# EAGLE board MicroMod_Processor_Board-nRF52840-Panel (EAGLE 9.4.2), part 1 of 6
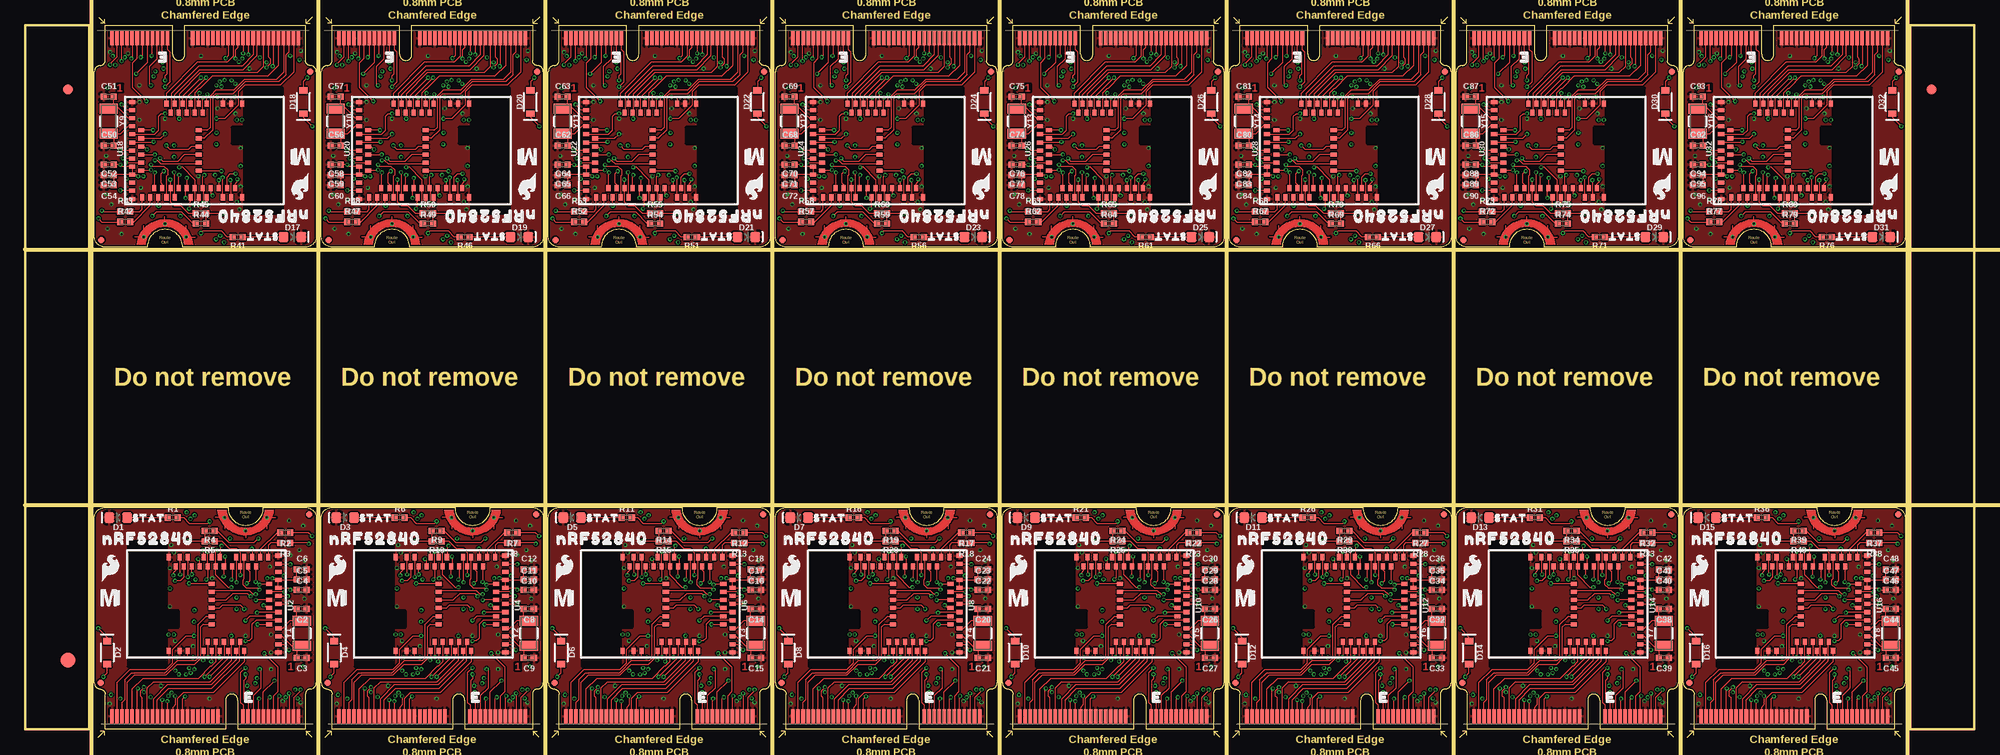
[diagram p0: board, top side]
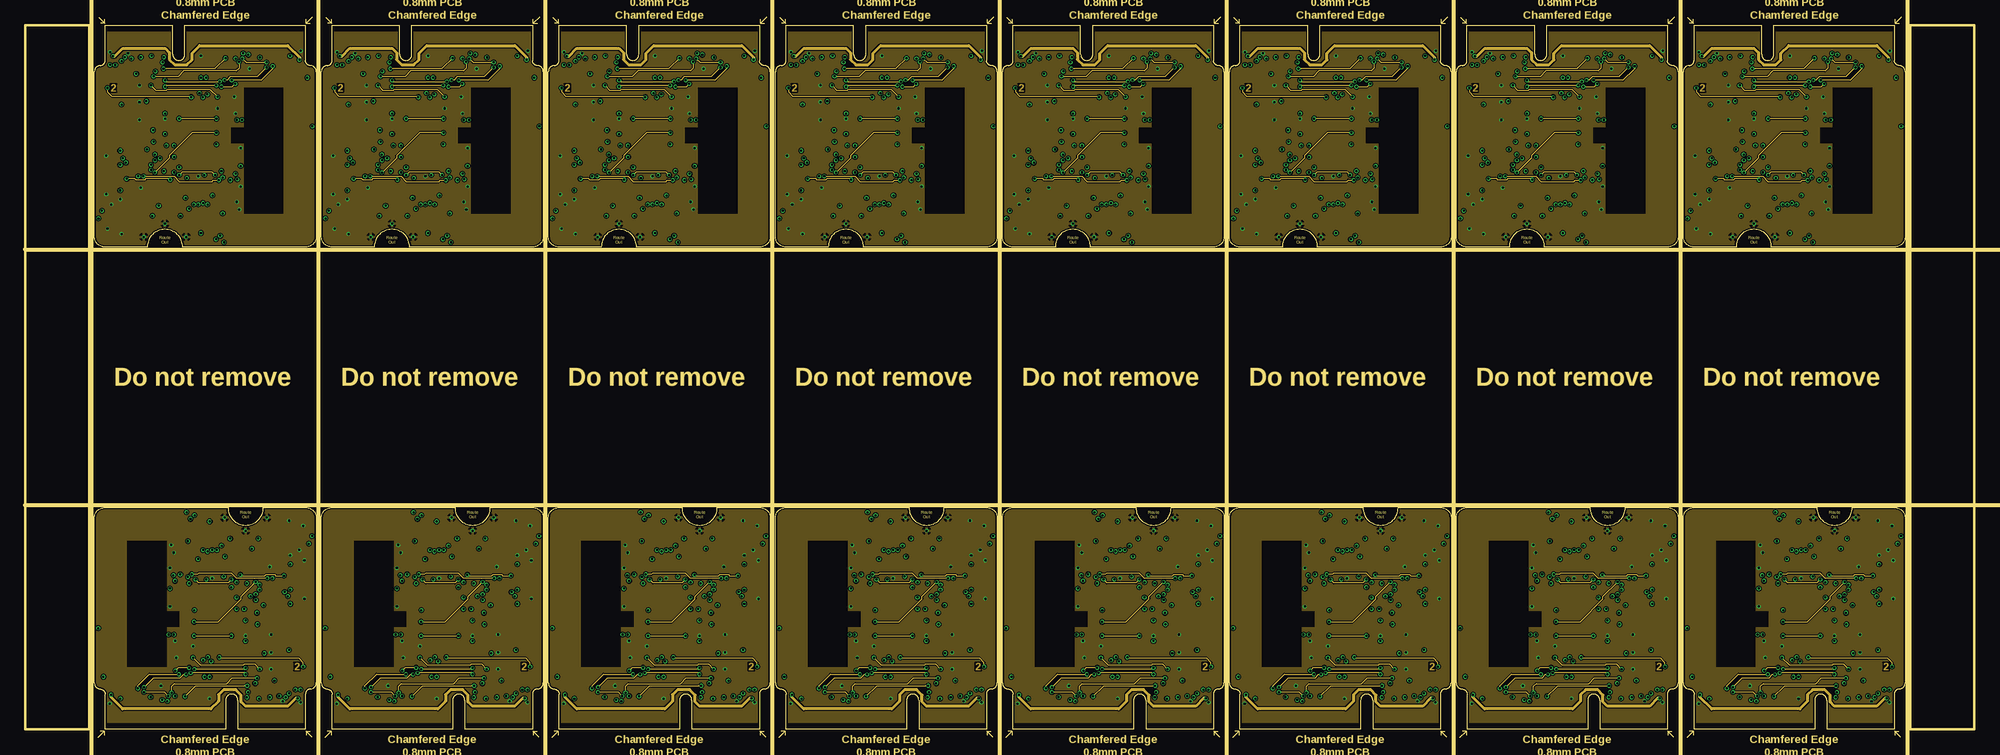
[diagram p1: board, inner layer Route2]
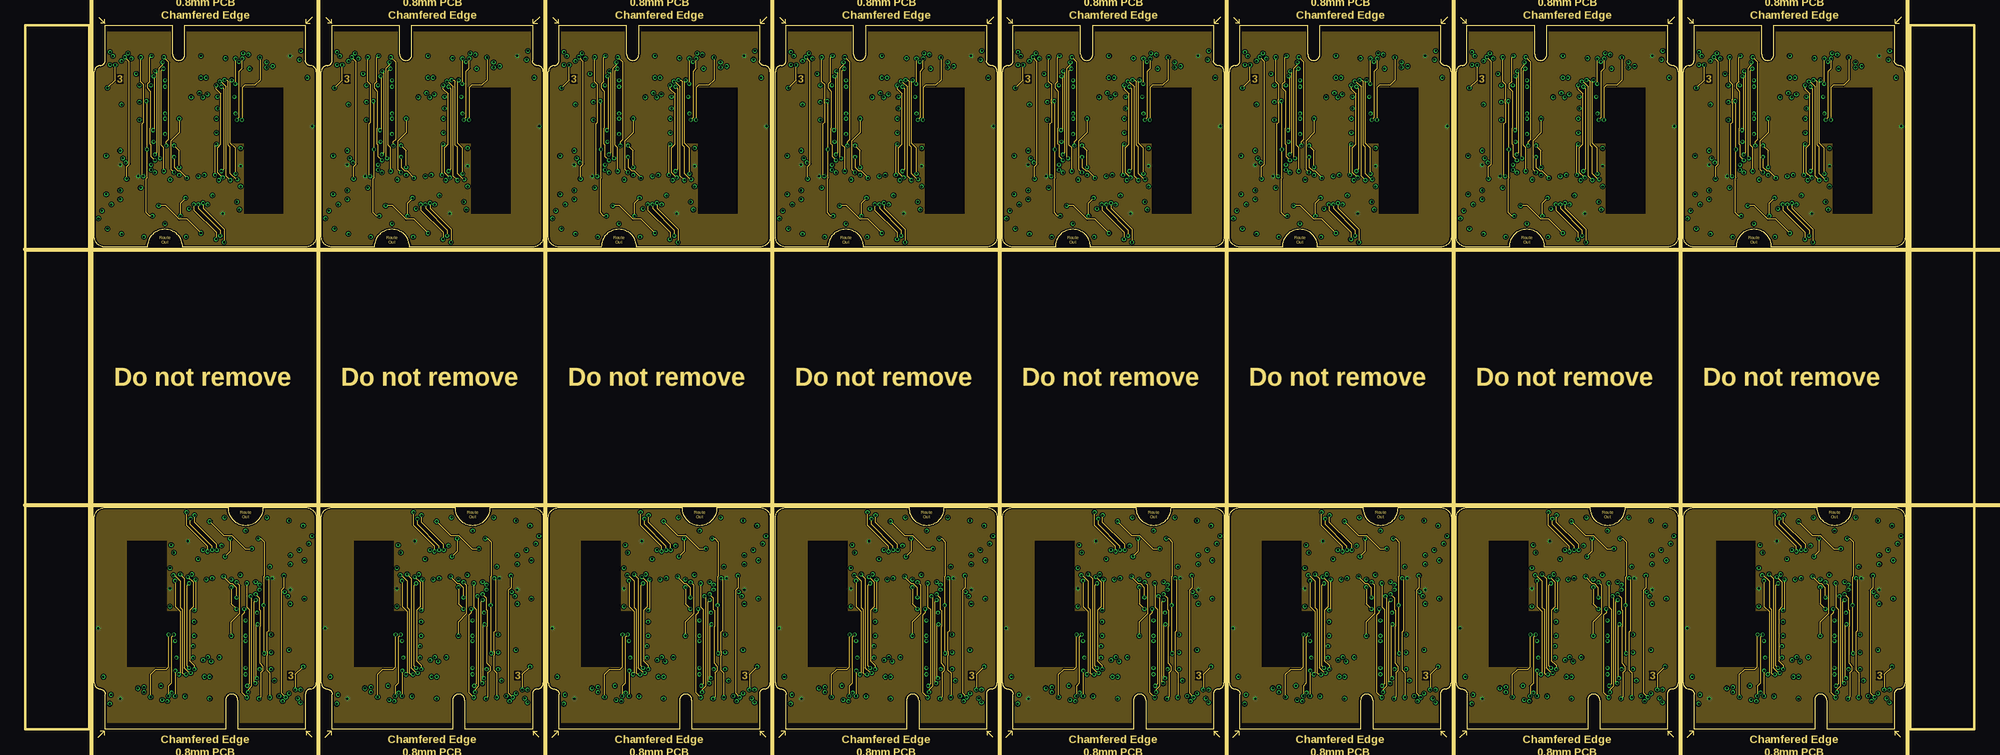
[diagram p2: board, inner layer Route15]
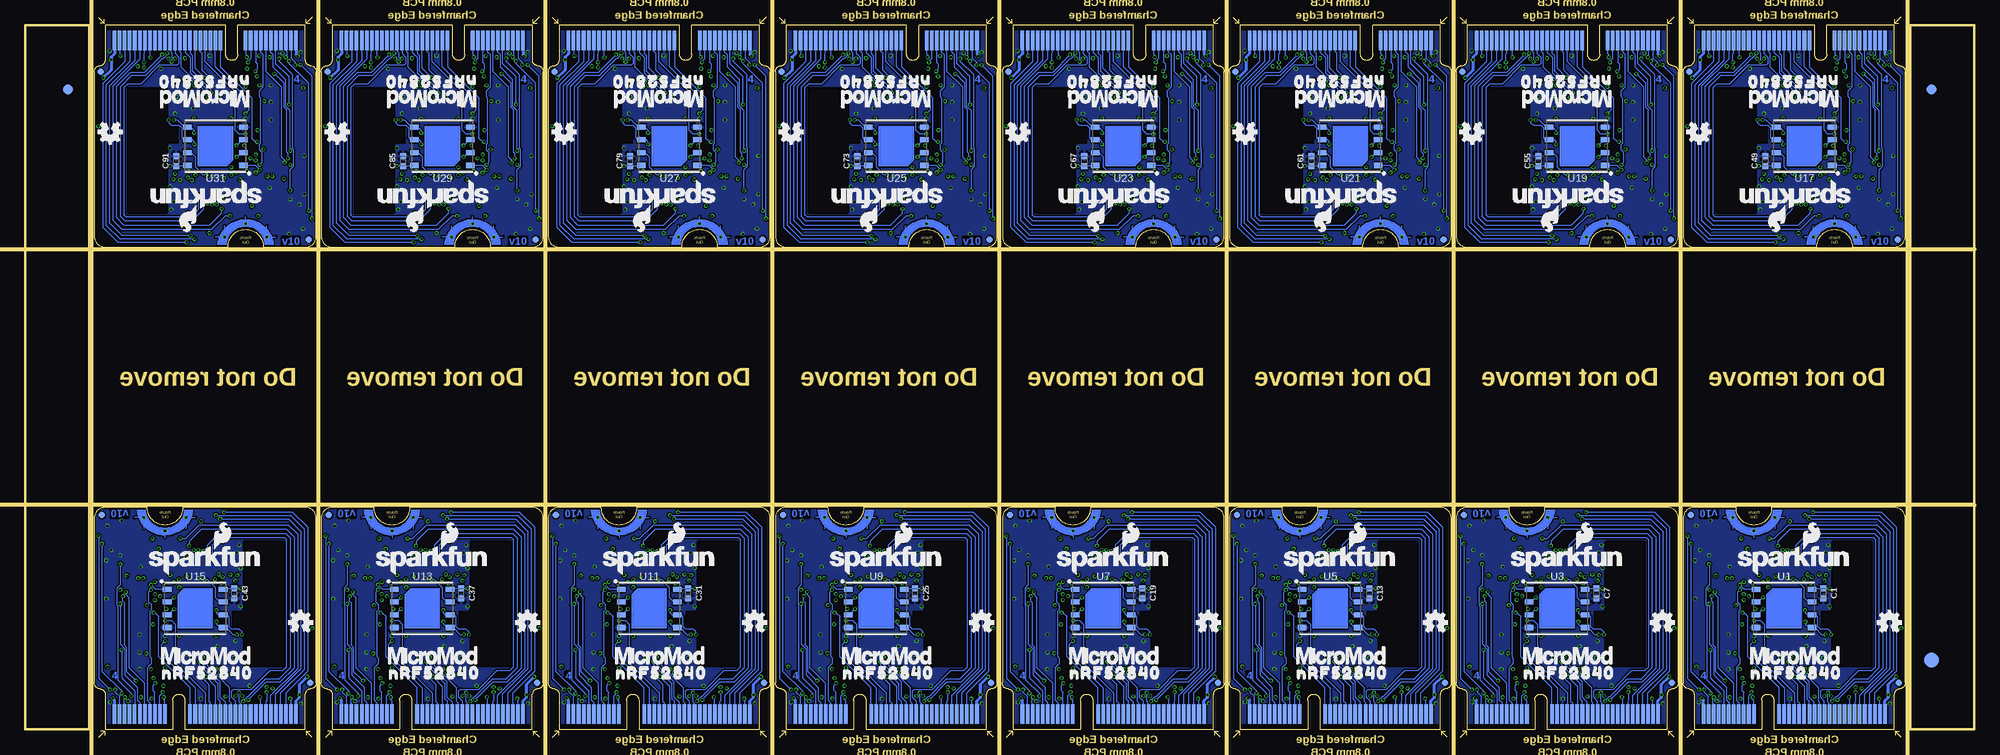
[diagram p3: board, bottom side, seen from below]

Size 193.27 x 69.85 mm. Coordinates in mm from the lower left corner, seen from the top.
Outline: 328 segments
Copper layers (1+2*15+16): Top 0.035mm / dielectric 1.5mm / Route2 0.035mm / dielectric 0.15mm / Route15 0.035mm / dielectric 0.2mm / Bottom 0.035mm
Design rules "MicroMod_Processor_Board-nRF52840": minimum track width 4mil, minimum drill 0.2mm, track to track 4mil, track to pad 4mil, pad to pad 4mil, via to via 4mil, smd to smd 4mil, copper to edge 6mil, drill to drill 6mil, minimum pad ring 3mil, minimum via ring 3mil, stop-mask expansion 4mil, vias tented up to drill 25mil, thermal gap 10mil
Net classes: 0 default: width 0 mm, drill 0 mm
Milling: 11 lines

## Footprints (pad centres in the part's own frame; a part is rotated, then mirrored left to right if it is on the bottom)
0402-TIGHT = smd 0.6 x 0.6: 1 -0.5,0; 2 0.5,0
LED-0603 = smd 1 x 1: A -0.877,0; C 0.877,0
SOD-323 = smd 0.63 x 0.83: A 1.15,0; C -1.15,0
FIDUCIAL-1X2 = smd 1 x 1: 1 0,0
FIDUCIAL-1.5X3 = smd 1.5 x 1.5: 1 0,0
FIDUCIAL-MICRO = smd 0.635 x 0.635: 1 0,0
M.2-CARD-E-22 = smd 0.35 x 1.45: 1 9.25,1.275; 3 8.75,1.275; 5 8.25,1.275; 7 7.75,1.275; 9 7.25,1.275; 11 6.75,1.275; 13 6.25,1.275; 15 5.75,1.275; 17 5.25,1.275; 19 4.75,1.275; 21 4.25,1.275; 23 3.75,1.275; 33 1.25,1.275; 35 0.75,1.275; 37 0.25,1.275; 39 -0.25,1.275; 41 -0.75,1.275; 43 -1.25,1.275; 45 -1.75,1.275; 47 -2.25,1.275; 49 -2.75,1.275; 51 -3.25,1.275; 53 -3.75,1.275; 55 -4.25,1.275; 57 -4.75,1.275; 59 -5.25,1.275; 61 -5.75,1.275; 63 -6.25,1.275; 65 -6.75,1.275; 67 -7.25,1.275; 69 -7.75,1.275; 71 -8.25,1.275; 73 -8.75,1.275; 75 -9.25,1.275 | smd 0.35 x 1.95 bottom: 2 9,1.525; 4 8.5,1.525; 6 8,1.525; 8 7.5,1.525; 10 7,1.525; 12 6.5,1.525; 14 6,1.525; 16 5.5,1.525; 18 5,1.525; 20 4.5,1.525; 22 4,1.525; 32 1.5,1.525; 34 1,1.525; 36 0.5,1.525; 38 0,1.525; 40 -0.5,1.525; 42 -1,1.525; 44 -1.5,1.525; 46 -2,1.525; 48 -2.5,1.525; 50 -3,1.525; 52 -3.5,1.525; 54 -4,1.525; 56 -4.5,1.525; 58 -5,1.525; 60 -5.5,1.525; 62 -6,1.525; 64 -6.5,1.525; 66 -7,1.525; 68 -7.5,1.525; 70 -8,1.525; 72 -8.5,1.525; 74 -9,1.525 | drill 0.2: GND1 1.9,21; GND2 4,19.7; GND3 6.1,21
WSON-8-6X5 = smd 0.85 x 0.5: 1 -2.775,1.905; 2 -2.775,0.635; 3 -2.775,-0.635; 4 -2.775,-1.905; 5 2.775,-1.905; 6 2.775,-0.635; 7 2.775,0.635; 8 2.775,1.905
MDBT50Q = smd 0.6 x 0.4: 1 -4.65,3.65; 2 -4.65,2.55; 3 -4.65,1.75; 4 -4.65,0.15; 5 -3.75,-0.25; 6 -4.65,-0.65; 7 -3.75,-1.05; 8 -4.65,-1.45; 9 -3.75,-1.85; 10 -4.65,-2.25; 11 -3.75,-2.65; 12 -4.65,-3.05; 13 -3.75,-3.45; 14 -4.65,-3.85; 34 4.65,-6.25; 35 4.65,-5.45; 36 3.75,-5.05; 37 4.65,-4.65; 38 3.75,-4.25; 39 4.65,-3.85; 40 3.75,-3.45; 41 4.65,-3.05; 42 3.75,-2.65; 43 3.75,-1.85; 44 4.65,-1.45; 45 3.75,-1.05; 46 4.65,-0.65; 47 3.75,-0.25; 48 4.65,0.15; 49 3.75,0.55; 50 3.75,1.35; 51 4.65,1.75; 52 3.75,2.15; 53 4.65,2.55; 54 3.75,2.95; 55 4.65,3.65 | smd 0.4 x 0.6: 15 -4.8,-7.25; 16 -4,-7.25; 17 -3.2,-7.25; 18 -2.4,-7.25; 19 -2,-6.35; 20 -1.6,-7.25; 21 -1.2,-6.35; 22 -0.8,-7.25; 23 -0.4,-6.35; 24 0,-7.25; 25 0.4,-6.35; 26 0.8,-7.25; 27 1.2,-6.35; 28 1.6,-7.25; 29 2,-6.35; 30 2.4,-7.25; 31 3.2,-7.25; 32 4,-7.25; 33 4.8,-7.25; 56 -2,-0.65; 57 -1.2,-0.65; 58 -0.4,-0.65; 59 0.4,-0.65; 60 1.2,-0.65; 61 2,-0.65
CRYSTAL-SMD-3.2X1.5MM = smd 1 x 1.8: P$1 -1.25,0; P$2 1.25,0

## Placement (x,y rotation side)
C1  0.1uF  [0402-TIGHT]  14.98,13.49 270 bottom
C2  15pF  [0402-TIGHT]  27.43,11.94 180 top
C3  15pF  [0402-TIGHT]  27.43,7.11 180 top
C4  10uF  [0402-TIGHT]  27.43,13.84 0 top
C5  10uF  [0402-TIGHT]  27.43,14.86 0 top
C6  0.1uF  [0402-TIGHT]  27.43,15.88 0 top
C7  0.1uF  [0402-TIGHT]  37.49,13.49 270 bottom
C8  15pF  [0402-TIGHT]  49.94,11.94 180 top
C9  15pF  [0402-TIGHT]  49.94,7.11 180 top
C10  10uF  [0402-TIGHT]  49.94,13.84 0 top
C11  10uF  [0402-TIGHT]  49.94,14.86 0 top
C12  0.1uF  [0402-TIGHT]  49.94,15.88 0 top
C13  0.1uF  [0402-TIGHT]  60,13.49 270 bottom
C14  15pF  [0402-TIGHT]  72.45,11.94 180 top
C15  15pF  [0402-TIGHT]  72.45,7.11 180 top
C16  10uF  [0402-TIGHT]  72.45,13.84 0 top
C17  10uF  [0402-TIGHT]  72.45,14.86 0 top
C18  0.1uF  [0402-TIGHT]  72.45,15.88 0 top
C19  0.1uF  [0402-TIGHT]  82.51,13.49 270 bottom
C20  15pF  [0402-TIGHT]  94.96,11.94 180 top
C21  15pF  [0402-TIGHT]  94.96,7.11 180 top
C22  10uF  [0402-TIGHT]  94.96,13.84 0 top
C23  10uF  [0402-TIGHT]  94.96,14.86 0 top
C24  0.1uF  [0402-TIGHT]  94.96,15.88 0 top
C25  0.1uF  [0402-TIGHT]  105.02,13.49 270 bottom
C26  15pF  [0402-TIGHT]  117.46,11.94 180 top
C27  15pF  [0402-TIGHT]  117.46,7.11 180 top
C28  10uF  [0402-TIGHT]  117.46,13.84 0 top
C29  10uF  [0402-TIGHT]  117.46,14.86 0 top
C30  0.1uF  [0402-TIGHT]  117.46,15.88 0 top
C31  0.1uF  [0402-TIGHT]  127.52,13.49 270 bottom
C32  15pF  [0402-TIGHT]  139.97,11.94 180 top
C33  15pF  [0402-TIGHT]  139.97,7.11 180 top
C34  10uF  [0402-TIGHT]  139.97,13.84 0 top
C35  10uF  [0402-TIGHT]  139.97,14.86 0 top
C36  0.1uF  [0402-TIGHT]  139.97,15.88 0 top
C37  0.1uF  [0402-TIGHT]  150.03,13.49 270 bottom
C38  15pF  [0402-TIGHT]  162.48,11.94 180 top
C39  15pF  [0402-TIGHT]  162.48,7.11 180 top
C40  10uF  [0402-TIGHT]  162.48,13.84 0 top
C41  10uF  [0402-TIGHT]  162.48,14.86 0 top
C42  0.1uF  [0402-TIGHT]  162.48,15.88 0 top
C43  0.1uF  [0402-TIGHT]  172.54,13.49 270 bottom
C44  15pF  [0402-TIGHT]  184.99,11.94 180 top
C45  15pF  [0402-TIGHT]  184.99,7.11 180 top
C46  10uF  [0402-TIGHT]  184.99,13.84 0 top
C47  10uF  [0402-TIGHT]  184.99,14.86 0 top
C48  0.1uF  [0402-TIGHT]  184.99,15.88 0 top
C49  0.1uF  [0402-TIGHT]  20.73,56.36 90 bottom
C50  15pF  [0402-TIGHT]  8.28,57.91 0 top
C51  15pF  [0402-TIGHT]  8.28,62.74 0 top
C52  10uF  [0402-TIGHT]  8.28,56.01 180 top
C53  10uF  [0402-TIGHT]  8.28,54.99 180 top
C54  0.1uF  [0402-TIGHT]  8.28,53.98 180 top
C55  0.1uF  [0402-TIGHT]  43.24,56.36 90 bottom
C56  15pF  [0402-TIGHT]  30.79,57.91 0 top
C57  15pF  [0402-TIGHT]  30.79,62.74 0 top
C58  10uF  [0402-TIGHT]  30.79,56.01 180 top
C59  10uF  [0402-TIGHT]  30.79,54.99 180 top
C60  0.1uF  [0402-TIGHT]  30.79,53.98 180 top
C61  0.1uF  [0402-TIGHT]  65.75,56.36 90 bottom
C62  15pF  [0402-TIGHT]  53.3,57.91 0 top
C63  15pF  [0402-TIGHT]  53.3,62.74 0 top
C64  10uF  [0402-TIGHT]  53.3,56.01 180 top
C65  10uF  [0402-TIGHT]  53.3,54.99 180 top
C66  0.1uF  [0402-TIGHT]  53.3,53.98 180 top
C67  0.1uF  [0402-TIGHT]  88.26,56.36 90 bottom
C68  15pF  [0402-TIGHT]  75.81,57.91 0 top
C69  15pF  [0402-TIGHT]  75.81,62.74 0 top
C70  10uF  [0402-TIGHT]  75.81,56.01 180 top
C71  10uF  [0402-TIGHT]  75.81,54.99 180 top
C72  0.1uF  [0402-TIGHT]  75.81,53.98 180 top
C73  0.1uF  [0402-TIGHT]  110.76,56.36 90 bottom
C74  15pF  [0402-TIGHT]  98.32,57.91 0 top
C75  15pF  [0402-TIGHT]  98.32,62.74 0 top
C76  10uF  [0402-TIGHT]  98.32,56.01 180 top
C77  10uF  [0402-TIGHT]  98.32,54.99 180 top
C78  0.1uF  [0402-TIGHT]  98.32,53.98 180 top
C79  0.1uF  [0402-TIGHT]  133.27,56.36 90 bottom
C80  15pF  [0402-TIGHT]  120.83,57.91 0 top
C81  15pF  [0402-TIGHT]  120.83,62.74 0 top
C82  10uF  [0402-TIGHT]  120.83,56.01 180 top
C83  10uF  [0402-TIGHT]  120.83,54.99 180 top
C84  0.1uF  [0402-TIGHT]  120.83,53.98 180 top
C85  0.1uF  [0402-TIGHT]  155.78,56.36 90 bottom
C86  15pF  [0402-TIGHT]  143.33,57.91 0 top
C87  15pF  [0402-TIGHT]  143.33,62.74 0 top
C88  10uF  [0402-TIGHT]  143.33,56.01 180 top
C89  10uF  [0402-TIGHT]  143.33,54.99 180 top
C90  0.1uF  [0402-TIGHT]  143.33,53.98 180 top
C91  0.1uF  [0402-TIGHT]  178.29,56.36 90 bottom
C92  15pF  [0402-TIGHT]  165.84,57.91 0 top
C93  15pF  [0402-TIGHT]  165.84,62.74 0 top
C94  10uF  [0402-TIGHT]  165.84,56.01 180 top
C95  10uF  [0402-TIGHT]  165.84,54.99 180 top
C96  0.1uF  [0402-TIGHT]  165.84,53.98 180 top
D1  BLUE  [LED-0603]  9.22,21 180 top
D2  1A/23V/620mV  [SOD-323]  8.13,7.62 270 top
D3  BLUE  [LED-0603]  31.73,21 180 top
D4  1A/23V/620mV  [SOD-323]  30.63,7.62 270 top
D5  BLUE  [LED-0603]  54.24,21 180 top
D6  1A/23V/620mV  [SOD-323]  53.14,7.62 270 top
D7  BLUE  [LED-0603]  76.75,21 180 top
D8  1A/23V/620mV  [SOD-323]  75.65,7.62 270 top
D9  BLUE  [LED-0603]  99.26,21 180 top
D10  1A/23V/620mV  [SOD-323]  98.16,7.62 270 top
D11  BLUE  [LED-0603]  121.76,21 180 top
D12  1A/23V/620mV  [SOD-323]  120.67,7.62 270 top
D13  BLUE  [LED-0603]  144.27,21 180 top
D14  1A/23V/620mV  [SOD-323]  143.18,7.62 270 top
D15  BLUE  [LED-0603]  166.78,21 180 top
D16  1A/23V/620mV  [SOD-323]  165.68,7.62 270 top
D17  BLUE  [LED-0603]  26.49,48.85 0 top
D18  1A/23V/620mV  [SOD-323]  27.59,62.23 90 top
D19  BLUE  [LED-0603]  49,48.85 0 top
D20  1A/23V/620mV  [SOD-323]  50.1,62.23 90 top
D21  BLUE  [LED-0603]  71.51,48.85 0 top
D22  1A/23V/620mV  [SOD-323]  72.6,62.23 90 top
D23  BLUE  [LED-0603]  94.02,48.85 0 top
D24  1A/23V/620mV  [SOD-323]  95.11,62.23 90 top
D25  BLUE  [LED-0603]  116.52,48.85 0 top
D26  1A/23V/620mV  [SOD-323]  117.62,62.23 90 top
D27  BLUE  [LED-0603]  139.03,48.85 0 top
D28  1A/23V/620mV  [SOD-323]  140.13,62.23 90 top
D29  BLUE  [LED-0603]  161.54,48.85 0 top
D30  1A/23V/620mV  [SOD-323]  162.64,62.23 90 top
D31  BLUE  [LED-0603]  184.05,48.85 0 top
D32  1A/23V/620mV  [SOD-323]  185.14,62.23 90 top
E$1  [FIDUCIAL-1X2]  4.23,63.5 0 top
E$2  [FIDUCIAL-1X2]  4.23,63.5 0 bottom
E$3  [FIDUCIAL-1X2]  189.04,63.5 0 top
E$4  [FIDUCIAL-1X2]  189.04,63.5 0 bottom
E$5  [FIDUCIAL-1.5X3]  4.23,6.86 0 top
E$6  [FIDUCIAL-1.5X3]  4.23,6.86 0 bottom
FD1  FIDUCIALUFIDUCIAL  [FIDUCIAL-MICRO]  7.48,4.62 0 top
FD2  FIDUCIALUFIDUCIAL  [FIDUCIAL-MICRO]  28.16,21.3 0 top
FD3  FIDUCIALUFIDUCIAL  [FIDUCIAL-MICRO]  28.11,21.25 0 bottom
FD4  FIDUCIALUFIDUCIAL  [FIDUCIAL-MICRO]  7.48,4.62 0 bottom
FD5  FIDUCIALUFIDUCIAL  [FIDUCIAL-MICRO]  29.98,4.62 0 top
FD6  FIDUCIALUFIDUCIAL  [FIDUCIAL-MICRO]  50.66,21.3 0 top
FD7  FIDUCIALUFIDUCIAL  [FIDUCIAL-MICRO]  50.62,21.25 0 bottom
FD8  FIDUCIALUFIDUCIAL  [FIDUCIAL-MICRO]  29.98,4.62 0 bottom
FD9  FIDUCIALUFIDUCIAL  [FIDUCIAL-MICRO]  52.49,4.62 0 top
FD10  FIDUCIALUFIDUCIAL  [FIDUCIAL-MICRO]  73.17,21.3 0 top
FD11  FIDUCIALUFIDUCIAL  [FIDUCIAL-MICRO]  73.13,21.25 0 bottom
FD12  FIDUCIALUFIDUCIAL  [FIDUCIAL-MICRO]  52.49,4.62 0 bottom
FD13  FIDUCIALUFIDUCIAL  [FIDUCIAL-MICRO]  75,4.62 0 top
FD14  FIDUCIALUFIDUCIAL  [FIDUCIAL-MICRO]  95.68,21.3 0 top
FD15  FIDUCIALUFIDUCIAL  [FIDUCIAL-MICRO]  95.64,21.25 0 bottom
FD16  FIDUCIALUFIDUCIAL  [FIDUCIAL-MICRO]  75,4.62 0 bottom
FD17  FIDUCIALUFIDUCIAL  [FIDUCIAL-MICRO]  97.51,4.62 0 top
FD18  FIDUCIALUFIDUCIAL  [FIDUCIAL-MICRO]  118.19,21.3 0 top
FD19  FIDUCIALUFIDUCIAL  [FIDUCIAL-MICRO]  118.14,21.25 0 bottom
FD20  FIDUCIALUFIDUCIAL  [FIDUCIAL-MICRO]  97.51,4.62 0 bottom
FD21  FIDUCIALUFIDUCIAL  [FIDUCIAL-MICRO]  120.02,4.62 0 top
FD22  FIDUCIALUFIDUCIAL  [FIDUCIAL-MICRO]  140.7,21.3 0 top
FD23  FIDUCIALUFIDUCIAL  [FIDUCIAL-MICRO]  140.65,21.25 0 bottom
FD24  FIDUCIALUFIDUCIAL  [FIDUCIAL-MICRO]  120.02,4.62 0 bottom
FD25  FIDUCIALUFIDUCIAL  [FIDUCIAL-MICRO]  142.53,4.62 0 top
FD26  FIDUCIALUFIDUCIAL  [FIDUCIAL-MICRO]  163.21,21.3 0 top
FD27  FIDUCIALUFIDUCIAL  [FIDUCIAL-MICRO]  163.16,21.25 0 bottom
FD28  FIDUCIALUFIDUCIAL  [FIDUCIAL-MICRO]  142.53,4.62 0 bottom
FD29  FIDUCIALUFIDUCIAL  [FIDUCIAL-MICRO]  165.03,4.62 0 top
FD30  FIDUCIALUFIDUCIAL  [FIDUCIAL-MICRO]  185.71,21.3 0 top
FD31  FIDUCIALUFIDUCIAL  [FIDUCIAL-MICRO]  185.67,21.25 0 bottom
FD32  FIDUCIALUFIDUCIAL  [FIDUCIAL-MICRO]  165.03,4.62 0 bottom
FD33  FIDUCIALUFIDUCIAL  [FIDUCIAL-MICRO]  28.24,65.23 180 top
FD34  FIDUCIALUFIDUCIAL  [FIDUCIAL-MICRO]  7.56,48.55 180 top
FD35  FIDUCIALUFIDUCIAL  [FIDUCIAL-MICRO]  7.6,48.6 180 bottom
FD36  FIDUCIALUFIDUCIAL  [FIDUCIAL-MICRO]  28.24,65.23 180 bottom
FD37  FIDUCIALUFIDUCIAL  [FIDUCIAL-MICRO]  50.75,65.23 180 top
FD38  FIDUCIALUFIDUCIAL  [FIDUCIAL-MICRO]  30.07,48.55 180 top
FD39  FIDUCIALUFIDUCIAL  [FIDUCIAL-MICRO]  30.11,48.6 180 bottom
FD40  FIDUCIALUFIDUCIAL  [FIDUCIAL-MICRO]  50.75,65.23 180 bottom
FD41  FIDUCIALUFIDUCIAL  [FIDUCIAL-MICRO]  73.25,65.23 180 top
FD42  FIDUCIALUFIDUCIAL  [FIDUCIAL-MICRO]  52.57,48.55 180 top
FD43  FIDUCIALUFIDUCIAL  [FIDUCIAL-MICRO]  52.62,48.6 180 bottom
FD44  FIDUCIALUFIDUCIAL  [FIDUCIAL-MICRO]  73.25,65.23 180 bottom
FD45  FIDUCIALUFIDUCIAL  [FIDUCIAL-MICRO]  95.76,65.23 180 top
FD46  FIDUCIALUFIDUCIAL  [FIDUCIAL-MICRO]  75.08,48.55 180 top
FD47  FIDUCIALUFIDUCIAL  [FIDUCIAL-MICRO]  75.13,48.6 180 bottom
FD48  FIDUCIALUFIDUCIAL  [FIDUCIAL-MICRO]  95.76,65.23 180 bottom
FD49  FIDUCIALUFIDUCIAL  [FIDUCIAL-MICRO]  118.27,65.23 180 top
FD50  FIDUCIALUFIDUCIAL  [FIDUCIAL-MICRO]  97.59,48.55 180 top
FD51  FIDUCIALUFIDUCIAL  [FIDUCIAL-MICRO]  97.64,48.6 180 bottom
FD52  FIDUCIALUFIDUCIAL  [FIDUCIAL-MICRO]  118.27,65.23 180 bottom
FD53  FIDUCIALUFIDUCIAL  [FIDUCIAL-MICRO]  140.78,65.23 180 top
FD54  FIDUCIALUFIDUCIAL  [FIDUCIAL-MICRO]  120.1,48.55 180 top
FD55  FIDUCIALUFIDUCIAL  [FIDUCIAL-MICRO]  120.15,48.6 180 bottom
FD56  FIDUCIALUFIDUCIAL  [FIDUCIAL-MICRO]  140.78,65.23 180 bottom
FD57  FIDUCIALUFIDUCIAL  [FIDUCIAL-MICRO]  163.29,65.23 180 top
FD58  FIDUCIALUFIDUCIAL  [FIDUCIAL-MICRO]  142.61,48.55 180 top
FD59  FIDUCIALUFIDUCIAL  [FIDUCIAL-MICRO]  142.65,48.6 180 bottom
FD60  FIDUCIALUFIDUCIAL  [FIDUCIAL-MICRO]  163.29,65.23 180 bottom
FD61  FIDUCIALUFIDUCIAL  [FIDUCIAL-MICRO]  185.79,65.23 180 top
FD62  FIDUCIALUFIDUCIAL  [FIDUCIAL-MICRO]  165.11,48.55 180 top
FD63  FIDUCIALUFIDUCIAL  [FIDUCIAL-MICRO]  165.16,48.6 180 bottom
FD64  FIDUCIALUFIDUCIAL  [FIDUCIAL-MICRO]  185.79,65.23 180 bottom
J1  MICROMOD-2222  [M.2-CARD-E-22]  17.86,0 0 top
J2  MICROMOD-2222  [M.2-CARD-E-22]  40.36,0 0 top
J3  MICROMOD-2222  [M.2-CARD-E-22]  62.87,0 0 top
J4  MICROMOD-2222  [M.2-CARD-E-22]  85.38,0 0 top
J5  MICROMOD-2222  [M.2-CARD-E-22]  107.89,0 0 top
J6  MICROMOD-2222  [M.2-CARD-E-22]  130.4,0 0 top
J7  MICROMOD-2222  [M.2-CARD-E-22]  152.91,0 0 top
J8  MICROMOD-2222  [M.2-CARD-E-22]  175.41,0 0 top
J9  MICROMOD-2222  [M.2-CARD-E-22]  17.86,69.85 180 top
J10  MICROMOD-2222  [M.2-CARD-E-22]  40.37,69.85 180 top
J11  MICROMOD-2222  [M.2-CARD-E-22]  62.87,69.85 180 top
J12  MICROMOD-2222  [M.2-CARD-E-22]  85.38,69.85 180 top
J13  MICROMOD-2222  [M.2-CARD-E-22]  107.89,69.85 180 top
J14  MICROMOD-2222  [M.2-CARD-E-22]  130.4,69.85 180 top
J15  MICROMOD-2222  [M.2-CARD-E-22]  152.91,69.85 180 top
J16  MICROMOD-2222  [M.2-CARD-E-22]  175.41,69.85 180 top
LOGO1  SFE_LOGO_NAME_FLAME.1_INCH  [SFE_LOGO_NAME_FLAME_.1]  17.86,16.79 0 bottom
LOGO2  SFE_LOGO_FLAME.1_INCH  [SFE_LOGO_FLAME_.1]  8.46,16.03 0 top
LOGO3  OSHW-LOGOMINI  [OSHW-LOGO-MINI]  8.42,10.61 0 bottom
LOGO4  OSHW-LOGOMINI  [OSHW-LOGO-MINI]  30.93,10.61 0 bottom
LOGO5  SFE_LOGO_NAME_FLAME.1_INCH  [SFE_LOGO_NAME_FLAME_.1]  40.36,16.79 0 bottom
LOGO6  SFE_LOGO_FLAME.1_INCH  [SFE_LOGO_FLAME_.1]  30.96,16.03 0 top
LOGO7  OSHW-LOGOMINI  [OSHW-LOGO-MINI]  53.44,10.61 0 bottom
LOGO8  SFE_LOGO_NAME_FLAME.1_INCH  [SFE_LOGO_NAME_FLAME_.1]  62.87,16.79 0 bottom
LOGO9  SFE_LOGO_FLAME.1_INCH  [SFE_LOGO_FLAME_.1]  53.47,16.03 0 top
LOGO10  OSHW-LOGOMINI  [OSHW-LOGO-MINI]  75.94,10.61 0 bottom
LOGO11  SFE_LOGO_NAME_FLAME.1_INCH  [SFE_LOGO_NAME_FLAME_.1]  85.38,16.79 0 bottom
LOGO12  SFE_LOGO_FLAME.1_INCH  [SFE_LOGO_FLAME_.1]  75.98,16.03 0 top
LOGO13  OSHW-LOGOMINI  [OSHW-LOGO-MINI]  98.45,10.61 0 bottom
LOGO14  SFE_LOGO_NAME_FLAME.1_INCH  [SFE_LOGO_NAME_FLAME_.1]  107.89,16.79 0 bottom
LOGO15  SFE_LOGO_FLAME.1_INCH  [SFE_LOGO_FLAME_.1]  98.49,16.03 0 top
LOGO16  OSHW-LOGOMINI  [OSHW-LOGO-MINI]  120.96,10.61 0 bottom
LOGO17  SFE_LOGO_NAME_FLAME.1_INCH  [SFE_LOGO_NAME_FLAME_.1]  130.4,16.79 0 bottom
LOGO18  SFE_LOGO_FLAME.1_INCH  [SFE_LOGO_FLAME_.1]  121,16.03 0 top
LOGO19  OSHW-LOGOMINI  [OSHW-LOGO-MINI]  143.47,10.61 0 bottom
LOGO20  SFE_LOGO_NAME_FLAME.1_INCH  [SFE_LOGO_NAME_FLAME_.1]  152.91,16.79 0 bottom
LOGO21  SFE_LOGO_FLAME.1_INCH  [SFE_LOGO_FLAME_.1]  143.51,16.03 0 top
LOGO22  OSHW-LOGOMINI  [OSHW-LOGO-MINI]  165.98,10.61 0 bottom
LOGO23  SFE_LOGO_NAME_FLAME.1_INCH  [SFE_LOGO_NAME_FLAME_.1]  175.41,16.79 0 bottom
LOGO24  SFE_LOGO_FLAME.1_INCH  [SFE_LOGO_FLAME_.1]  166.01,16.03 0 top
LOGO25  OSHW-LOGOMINI  [OSHW-LOGO-MINI]  27.29,59.24 180 bottom
LOGO26  SFE_LOGO_NAME_FLAME.1_INCH  [SFE_LOGO_NAME_FLAME_.1]  17.86,53.06 180 bottom
LOGO27  SFE_LOGO_FLAME.1_INCH  [SFE_LOGO_FLAME_.1]  27.26,53.82 180 top
LOGO28  OSHW-LOGOMINI  [OSHW-LOGO-MINI]  49.8,59.24 180 bottom
LOGO29  SFE_LOGO_NAME_FLAME.1_INCH  [SFE_LOGO_NAME_FLAME_.1]  40.37,53.06 180 bottom
LOGO30  SFE_LOGO_FLAME.1_INCH  [SFE_LOGO_FLAME_.1]  49.77,53.82 180 top
LOGO31  OSHW-LOGOMINI  [OSHW-LOGO-MINI]  72.31,59.24 180 bottom
LOGO32  SFE_LOGO_NAME_FLAME.1_INCH  [SFE_LOGO_NAME_FLAME_.1]  62.87,53.06 180 bottom
LOGO33  SFE_LOGO_FLAME.1_INCH  [SFE_LOGO_FLAME_.1]  72.27,53.82 180 top
LOGO34  OSHW-LOGOMINI  [OSHW-LOGO-MINI]  94.82,59.24 180 bottom
LOGO35  SFE_LOGO_NAME_FLAME.1_INCH  [SFE_LOGO_NAME_FLAME_.1]  85.38,53.06 180 bottom
LOGO36  SFE_LOGO_FLAME.1_INCH  [SFE_LOGO_FLAME_.1]  94.78,53.82 180 top
LOGO37  OSHW-LOGOMINI  [OSHW-LOGO-MINI]  117.33,59.24 180 bottom
LOGO38  SFE_LOGO_NAME_FLAME.1_INCH  [SFE_LOGO_NAME_FLAME_.1]  107.89,53.06 180 bottom
LOGO39  SFE_LOGO_FLAME.1_INCH  [SFE_LOGO_FLAME_.1]  117.29,53.82 180 top
LOGO40  OSHW-LOGOMINI  [OSHW-LOGO-MINI]  139.84,59.24 180 bottom
LOGO41  SFE_LOGO_NAME_FLAME.1_INCH  [SFE_LOGO_NAME_FLAME_.1]  130.4,53.06 180 bottom
LOGO42  SFE_LOGO_FLAME.1_INCH  [SFE_LOGO_FLAME_.1]  139.8,53.82 180 top
LOGO43  OSHW-LOGOMINI  [OSHW-LOGO-MINI]  162.34,59.24 180 bottom
LOGO44  SFE_LOGO_NAME_FLAME.1_INCH  [SFE_LOGO_NAME_FLAME_.1]  152.91,53.06 180 bottom
LOGO45  SFE_LOGO_FLAME.1_INCH  [SFE_LOGO_FLAME_.1]  162.31,53.82 180 top
LOGO46  OSHW-LOGOMINI  [OSHW-LOGO-MINI]  184.85,59.24 180 bottom
LOGO47  SFE_LOGO_NAME_FLAME.1_INCH  [SFE_LOGO_NAME_FLAME_.1]  175.41,53.06 180 bottom
LOGO48  SFE_LOGO_FLAME.1_INCH  [SFE_LOGO_FLAME_.1]  184.81,53.82 180 top
R1  1k  [0402-TIGHT]  14.64,21 0 top
R2  27OHM  [0402-TIGHT]  25.8,19.51 180 top
R3  27OHM  [0402-TIGHT]  25.8,18.49 180 top
R4  10k  [0402-TIGHT]  18.29,19.67 180 top
R5  10k  [0402-TIGHT]  18.29,18.65 180 top
R6  1k  [0402-TIGHT]  37.14,21 0 top
R7  27OHM  [0402-TIGHT]  48.3,19.51 180 top
R8  27OHM  [0402-TIGHT]  48.3,18.49 180 top
R9  10k  [0402-TIGHT]  40.79,19.67 180 top
R10  10k  [0402-TIGHT]  40.79,18.65 180 top
R11  1k  [0402-TIGHT]  59.65,21 0 top
R12  27OHM  [0402-TIGHT]  70.81,19.51 180 top
R13  27OHM  [0402-TIGHT]  70.81,18.49 180 top
R14  10k  [0402-TIGHT]  63.3,19.67 180 top
R15  10k  [0402-TIGHT]  63.3,18.65 180 top
R16  1k  [0402-TIGHT]  82.16,21 0 top
R17  27OHM  [0402-TIGHT]  93.32,19.51 180 top
R18  27OHM  [0402-TIGHT]  93.32,18.49 180 top
R19  10k  [0402-TIGHT]  85.81,19.67 180 top
R20  10k  [0402-TIGHT]  85.81,18.65 180 top
R21  1k  [0402-TIGHT]  104.67,21 0 top
R22  27OHM  [0402-TIGHT]  115.83,19.51 180 top
R23  27OHM  [0402-TIGHT]  115.83,18.49 180 top
R24  10k  [0402-TIGHT]  108.32,19.67 180 top
R25  10k  [0402-TIGHT]  108.32,18.65 180 top
R26  1k  [0402-TIGHT]  127.18,21 0 top
R27  27OHM  [0402-TIGHT]  138.34,19.51 180 top
R28  27OHM  [0402-TIGHT]  138.34,18.49 180 top
R29  10k  [0402-TIGHT]  130.83,19.67 180 top
R30  10k  [0402-TIGHT]  130.83,18.65 180 top
R31  1k  [0402-TIGHT]  149.69,21 0 top
R32  27OHM  [0402-TIGHT]  160.85,19.51 180 top
R33  27OHM  [0402-TIGHT]  160.85,18.49 180 top
R34  10k  [0402-TIGHT]  153.34,19.67 180 top
R35  10k  [0402-TIGHT]  153.34,18.65 180 top
R36  1k  [0402-TIGHT]  172.19,21 0 top
R37  27OHM  [0402-TIGHT]  183.35,19.51 180 top
R38  27OHM  [0402-TIGHT]  183.35,18.49 180 top
R39  10k  [0402-TIGHT]  175.84,19.67 180 top
R40  10k  [0402-TIGHT]  175.84,18.65 180 top
R41  1k  [0402-TIGHT]  21.08,48.85 180 top
R42  27OHM  [0402-TIGHT]  9.92,50.34 0 top
R43  27OHM  [0402-TIGHT]  9.92,51.36 0 top
R44  10k  [0402-TIGHT]  17.43,50.18 0 top
R45  10k  [0402-TIGHT]  17.43,51.2 0 top
R46  1k  [0402-TIGHT]  43.59,48.85 180 top
R47  27OHM  [0402-TIGHT]  32.43,50.34 0 top
R48  27OHM  [0402-TIGHT]  32.43,51.36 0 top
R49  10k  [0402-TIGHT]  39.94,50.18 0 top
R50  10k  [0402-TIGHT]  39.94,51.2 0 top
R51  1k  [0402-TIGHT]  66.1,48.85 180 top
R52  27OHM  [0402-TIGHT]  54.94,50.34 0 top
R53  27OHM  [0402-TIGHT]  54.94,51.36 0 top
R54  10k  [0402-TIGHT]  62.44,50.18 0 top
R55  10k  [0402-TIGHT]  62.44,51.2 0 top
R56  1k  [0402-TIGHT]  88.6,48.85 180 top
R57  27OHM  [0402-TIGHT]  77.44,50.34 0 top
R58  27OHM  [0402-TIGHT]  77.44,51.36 0 top
R59  10k  [0402-TIGHT]  84.95,50.18 0 top
R60  10k  [0402-TIGHT]  84.95,51.2 0 top
R61  1k  [0402-TIGHT]  111.11,48.85 180 top
R62  27OHM  [0402-TIGHT]  99.95,50.34 0 top
R63  27OHM  [0402-TIGHT]  99.95,51.36 0 top
R64  10k  [0402-TIGHT]  107.46,50.18 0 top
R65  10k  [0402-TIGHT]  107.46,51.2 0 top
R66  1k  [0402-TIGHT]  133.62,48.85 180 top
R67  27OHM  [0402-TIGHT]  122.46,50.34 0 top
R68  27OHM  [0402-TIGHT]  122.46,51.36 0 top
R69  10k  [0402-TIGHT]  129.97,50.18 0 top
R70  10k  [0402-TIGHT]  129.97,51.2 0 top
R71  1k  [0402-TIGHT]  156.13,48.85 180 top
R72  27OHM  [0402-TIGHT]  144.97,50.34 0 top
R73  27OHM  [0402-TIGHT]  144.97,51.36 0 top
R74  10k  [0402-TIGHT]  152.48,50.18 0 top
R75  10k  [0402-TIGHT]  152.48,51.2 0 top
R76  1k  [0402-TIGHT]  178.64,48.85 180 top
R77  27OHM  [0402-TIGHT]  167.48,50.34 0 top
R78  27OHM  [0402-TIGHT]  167.48,51.36 0 top
R79  10k  [0402-TIGHT]  174.98,50.18 0 top
R80  10k  [0402-TIGHT]  174.98,51.2 0 top
U1  W25QXX128MBIT-6X5  [WSON-8-6X5]  18.86,12 0 bottom
U2  MDBT50Q  [MDBT50Q]  17.86,12.43 90 top
U3  W25QXX128MBIT-6X5  [WSON-8-6X5]  41.36,12 0 bottom
U4  MDBT50Q  [MDBT50Q]  40.36,12.43 90 top
U5  W25QXX128MBIT-6X5  [WSON-8-6X5]  63.87,12 0 bottom
U6  MDBT50Q  [MDBT50Q]  62.87,12.43 90 top
U7  W25QXX128MBIT-6X5  [WSON-8-6X5]  86.38,12 0 bottom
U8  MDBT50Q  [MDBT50Q]  85.38,12.43 90 top
U9  W25QXX128MBIT-6X5  [WSON-8-6X5]  108.89,12 0 bottom
U10  MDBT50Q  [MDBT50Q]  107.89,12.43 90 top
U11  W25QXX128MBIT-6X5  [WSON-8-6X5]  131.4,12 0 bottom
U12  MDBT50Q  [MDBT50Q]  130.4,12.43 90 top
U13  W25QXX128MBIT-6X5  [WSON-8-6X5]  153.91,12 0 bottom
U14  MDBT50Q  [MDBT50Q]  152.91,12.43 90 top
U15  W25QXX128MBIT-6X5  [WSON-8-6X5]  176.41,12 0 bottom
U16  MDBT50Q  [MDBT50Q]  175.41,12.43 90 top
U17  W25QXX128MBIT-6X5  [WSON-8-6X5]  16.86,57.85 180 bottom
U18  MDBT50Q  [MDBT50Q]  17.86,57.42 270 top
U19  W25QXX128MBIT-6X5  [WSON-8-6X5]  39.37,57.85 180 bottom
U20  MDBT50Q  [MDBT50Q]  40.37,57.42 270 top
U21  W25QXX128MBIT-6X5  [WSON-8-6X5]  61.87,57.85 180 bottom
U22  MDBT50Q  [MDBT50Q]  62.87,57.42 270 top
U23  W25QXX128MBIT-6X5  [WSON-8-6X5]  84.38,57.85 180 bottom
U24  MDBT50Q  [MDBT50Q]  85.38,57.42 270 top
U25  W25QXX128MBIT-6X5  [WSON-8-6X5]  106.89,57.85 180 bottom
U26  MDBT50Q  [MDBT50Q]  107.89,57.42 270 top
U27  W25QXX128MBIT-6X5  [WSON-8-6X5]  129.4,57.85 180 bottom
U28  MDBT50Q  [MDBT50Q]  130.4,57.42 270 top
U29  W25QXX128MBIT-6X5  [WSON-8-6X5]  151.91,57.85 180 bottom
U30  MDBT50Q  [MDBT50Q]  152.91,57.42 270 top
U31  W25QXX128MBIT-6X5  [WSON-8-6X5]  174.41,57.85 180 bottom
U32  MDBT50Q  [MDBT50Q]  175.41,57.42 270 top
U$1  [MICROMOD_MI_LOGO_.35]  8.41,13.08 0 top
U$2  [STAT0]  12.26,20.95 0 top
U$3  [NRF528400]  17.65,5.59 0 bottom
U$4  [MICROMOD_MI_LOGO_.35]  30.91,13.08 0 top
U$5  [MICROMOD_LOGO_.35]  17.86,7.3 0 bottom
U$6  [NRF528400]  12.19,18.92 0 top
U$7  [MICROMOD_LOGO_.35]  40.36,7.3 0 bottom
U$8  [NRF528400]  34.7,18.92 0 top
U$9  [NRF528400]  40.16,5.59 0 bottom
U$10  [STAT0]  34.76,20.95 0 top
U$11  [MICROMOD_MI_LOGO_.35]  53.42,13.08 0 top
U$12  [MICROMOD_LOGO_.35]  62.87,7.3 0 bottom
U$13  [NRF528400]  57.21,18.92 0 top
U$14  [NRF528400]  62.67,5.59 0 bottom
U$15  [STAT0]  57.27,20.95 0 top
U$16  [MICROMOD_MI_LOGO_.35]  75.93,13.08 0 top
U$17  [MICROMOD_LOGO_.35]  85.38,7.3 0 bottom
U$18  [NRF528400]  79.72,18.92 0 top
U$19  [NRF528400]  85.18,5.59 0 bottom
U$20  [STAT0]  79.78,20.95 0 top
U$21  [MICROMOD_MI_LOGO_.35]  98.44,13.08 0 top
U$22  [MICROMOD_LOGO_.35]  107.89,7.3 0 bottom
U$23  [NRF528400]  102.22,18.92 0 top
U$24  [NRF528400]  107.69,5.59 0 bottom
U$25  [STAT0]  102.29,20.95 0 top
U$26  [MICROMOD_MI_LOGO_.35]  120.95,13.08 0 top
U$27  [MICROMOD_LOGO_.35]  130.4,7.3 0 bottom
U$28  [NRF528400]  124.73,18.92 0 top
U$29  [NRF528400]  130.19,5.59 0 bottom
U$30  [STAT0]  124.8,20.95 0 top
U$31  [MICROMOD_MI_LOGO_.35]  143.46,13.08 0 top
U$32  [MICROMOD_LOGO_.35]  152.91,7.3 0 bottom
U$33  [NRF528400]  147.24,18.92 0 top
U$34  [NRF528400]  152.7,5.59 0 bottom
U$35  [STAT0]  147.3,20.95 0 top
U$36  [MICROMOD_MI_LOGO_.35]  165.96,13.08 0 top
U$37  [MICROMOD_LOGO_.35]  175.41,7.3 0 bottom
U$38  [NRF528400]  169.75,18.92 0 top
U$39  [NRF528400]  175.21,5.59 0 bottom
U$40  [STAT0]  169.81,20.95 0 top
U$41  [MICROMOD_MI_LOGO_.35]  27.31,56.77 180 top
U$42  [MICROMOD_LOGO_.35]  17.86,62.55 180 bottom
U$43  [NRF528400]  23.52,50.93 180 top
U$44  [NRF528400]  18.06,64.26 180 bottom
U$45  [STAT0]  23.46,48.9 180 top
U$46  [MICROMOD_MI_LOGO_.35]  49.82,56.77 180 top
U$47  [MICROMOD_LOGO_.35]  40.37,62.55 180 bottom
U$48  [NRF528400]  46.03,50.93 180 top
U$49  [NRF528400]  40.57,64.26 180 bottom
U$50  [STAT0]  45.97,48.9 180 top
U$51  [MICROMOD_MI_LOGO_.35]  72.32,56.77 180 top
U$52  [MICROMOD_LOGO_.35]  62.87,62.55 180 bottom
U$53  [NRF528400]  68.54,50.93 180 top
U$54  [NRF528400]  63.08,64.26 180 bottom
U$55  [STAT0]  68.48,48.9 180 top
U$56  [MICROMOD_MI_LOGO_.35]  94.83,56.77 180 top
U$57  [MICROMOD_LOGO_.35]  85.38,62.55 180 bottom
U$58  [NRF528400]  91.05,50.93 180 top
U$59  [NRF528400]  85.59,64.26 180 bottom
U$60  [STAT0]  90.99,48.9 180 top
U$61  [MICROMOD_MI_LOGO_.35]  117.34,56.77 180 top
U$62  [MICROMOD_LOGO_.35]  107.89,62.55 180 bottom
U$63  [NRF528400]  113.56,50.93 180 top
U$64  [NRF528400]  108.09,64.26 180 bottom
U$65  [STAT0]  113.49,48.9 180 top
U$66  [MICROMOD_MI_LOGO_.35]  139.85,56.77 180 top
U$67  [MICROMOD_LOGO_.35]  130.4,62.55 180 bottom
U$68  [NRF528400]  136.07,50.93 180 top
U$69  [NRF528400]  130.6,64.26 180 bottom
U$70  [STAT0]  136,48.9 180 top
U$71  [MICROMOD_MI_LOGO_.35]  162.36,56.77 180 top
U$72  [MICROMOD_LOGO_.35]  152.91,62.55 180 bottom
U$73  [NRF528400]  158.57,50.93 180 top
U$74  [NRF528400]  153.11,64.26 180 bottom
U$75  [STAT0]  158.51,48.9 180 top
U$76  [MICROMOD_MI_LOGO_.35]  184.86,56.77 180 top
U$77  [MICROMOD_LOGO_.35]  175.41,62.55 180 bottom
U$78  [NRF528400]  181.08,50.93 180 top
U$79  [NRF528400]  175.62,64.26 180 bottom
U$80  [STAT0]  181.02,48.9 180 top
Y1  32.768kHz  [CRYSTAL-SMD-3.2X1.5MM]  27.43,9.53 90 top
Y2  32.768kHz  [CRYSTAL-SMD-3.2X1.5MM]  49.94,9.53 90 top
Y3  32.768kHz  [CRYSTAL-SMD-3.2X1.5MM]  72.45,9.53 90 top
Y4  32.768kHz  [CRYSTAL-SMD-3.2X1.5MM]  94.96,9.53 90 top
Y5  32.768kHz  [CRYSTAL-SMD-3.2X1.5MM]  117.46,9.53 90 top
Y6  32.768kHz  [CRYSTAL-SMD-3.2X1.5MM]  139.97,9.53 90 top
Y7  32.768kHz  [CRYSTAL-SMD-3.2X1.5MM]  162.48,9.53 90 top
Y8  32.768kHz  [CRYSTAL-SMD-3.2X1.5MM]  184.99,9.53 90 top
Y9  32.768kHz  [CRYSTAL-SMD-3.2X1.5MM]  8.28,60.33 270 top
Y10  32.768kHz  [CRYSTAL-SMD-3.2X1.5MM]  30.79,60.33 270 top
Y11  32.768kHz  [CRYSTAL-SMD-3.2X1.5MM]  53.3,60.33 270 top
Y12  32.768kHz  [CRYSTAL-SMD-3.2X1.5MM]  75.81,60.33 270 top
Y13  32.768kHz  [CRYSTAL-SMD-3.2X1.5MM]  98.32,60.33 270 top
Y14  32.768kHz  [CRYSTAL-SMD-3.2X1.5MM]  120.83,60.33 270 top
Y15  32.768kHz  [CRYSTAL-SMD-3.2X1.5MM]  143.33,60.33 270 top
Y16  32.768kHz  [CRYSTAL-SMD-3.2X1.5MM]  165.84,60.33 270 top

## Library data of the parts
C1 C6 C7 C12 C13 C18 C19 C24 C25 C30 C31 C36 C37 C42 C43 C48 C49 C54 C55 C60 C61 C66 C67 C72 C73 C78 C79 C84 C85 C90 C91 C96 = SparkFun-Capacitors; PROD_ID: CAP-12416
C2 C3 C8 C9 C14 C15 C20 C21 C26 C27 C32 C33 C38 C39 C44 C45 C50 C51 C56 C57 C62 C63 C68 C69 C74 C75 C80 C81 C86 C87 C92 C93 = SparkFun-Capacitors; PROD_ID: CAP-13063
C4 C5 C10 C11 C16 C17 C22 C23 C28 C29 C34 C35 C40 C41 C46 C47 C52 C53 C58 C59 C64 C65 C70 C71 C76 C77 C82 C83 C88 C89 C94 C95 = SparkFun-Capacitors; PROD_ID: CAP-14848
D1 D3 D5 D7 D9 D11 D13 D15 D17 D19 D21 D23 D25 D27 D29 D31 = SparkFun-LED; PROD_ID: DIO-08575
D2 D4 D6 D8 D10 D12 D14 D16 D18 D20 D22 D24 D26 D28 D30 D32 = SparkFun-DiscreteSemi; PROD_ID: DIO-11623
E$1-E$4 FD1-FD64 LOGO1-LOGO48 = SparkFun-Aesthetics
E$5 E$6 = SparkFun-Retired
J1-J16 U$1 U$4 U$5 U$7 U$11 U$12 U$16 U$17 U$21 U$22 U$26 U$27 U$31 U$32 U$36 U$37 U$41 U$42 U$46 U$47 U$51 U$52 U$56 U$57 U$61 U$62 U$66 U$67 U$71 U$72 U$76 U$77 = SparkFun-MicroMod
R1 R6 R11 R16 R21 R26 R31 R36 R41 R46 R51 R56 R61 R66 R71 R76 = SparkFun-Resistors; PROD_ID: RES-14342
R2 R3 R7 R8 R12 R13 R17 R18 R22 R23 R27 R28 R32 R33 R37 R38 R42 R43 R47 R48 R52 R53 R57 R58 R62 R63 R67 R68 R72 R73 R77 R78 = SparkFun-Resistors; PROD_ID: RES-15238
R4 R5 R9 R10 R14 R15 R19 R20 R24 R25 R29 R30 R34 R35 R39 R40 R44 R45 R49 R50 R54 R55 R59 R60 R64 R65 R69 R70 R74 R75 R79 R80 = SparkFun-Resistors; PROD_ID: RES-14241
U1 U3 U5 U7 U9 U11 U13 U15 U17 U19 U21 U23 U25 U27 U29 U31 = SparkFun-MicroMod; PROD_ID: IC-15107
U2 U4 U6 U8 U10 U12 U14 U16 U18 U20 U22 U24 U26 U28 U30 U32 = SparkFun-RF; PROD_ID: IC-14109
U$2 U$3 U$6 U$8-U$10 U$13-U$15 U$18-U$20 U$23-U$25 U$28-U$30 U$33-U$35 U$38-U$40 U$43-U$45 U$48-U$50 U$53-U$55 U$58-U$60 U$63-U$65 U$68-U$70 U$73-U$75 U$78-U$80 = output
Y1-Y16 = SparkFun-Clocks; PROD_ID: XTAL-13062